# EAGLE board swd_breakout (EAGLE 7.5.0)
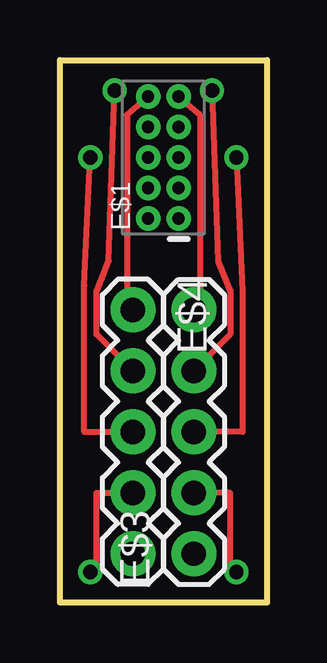
[diagram p0: board, top side]
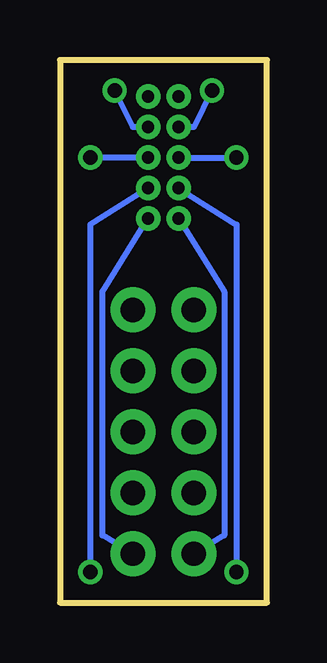
[diagram p1: board, bottom side, seen from below]

Size 8.64 x 22.61 mm. Coordinates in mm from the lower left corner, seen from the top.
Outline: 0,22.61 8.64,22.61 8.64,0 0,0 0,22.61
Copper layers (1*16): Top 0.035mm / dielectric 1.5mm / Bottom 0.035mm
Design rules "default": minimum track width 10mil, minimum drill 24mil, track to track 8mil, track to pad 8mil, pad to pad 8mil, via to via 8mil, smd to smd 8mil, copper to edge 40mil, drill to drill 8mil, minimum pad ring 10mil, minimum via ring 8mil, stop-mask expansion 4mil, vias tented up to drill 0mil, thermal gap 10mil

## Footprints (pad centres in the part's own frame; a part is rotated, then mirrored left to right if it is on the bottom)
2X5-PTH-1.27MM = drill 0.508 pad 1: 1 -2.54,-0.635; 2 -2.54,0.635; 3 -1.27,-0.635; 4 -1.27,0.635; 5 0,-0.635; 6 0,0.635; 7 1.27,-0.635; 8 1.27,0.635; 9 2.54,-0.635; 10 2.54,0.635
1X05 = drill 1.016 pad 1.88: 1 0,0; 2 2.54,0; 3 5.08,0; 4 7.62,0; 5 10.16,0

## Placement (x,y rotation side)
E$1  [2X5-PTH-1.27MM]  4.32,18.54 90 top
E$3  [1X05]  5.59,2.03 90 top
E$4  [1X05]  3.05,12.19 270 top

## Library data of the parts
E$1 E$3 E$4 = SparkFun-Connectors

## Nets
S$1: E$1.4 E$4.4
S$2: E$1.6 E$4.3
S$3: E$1.8 E$4.2
S$4: E$1.9 E$3.5
S$5: E$1.7 E$3.4
S$6: E$1.2 E$4.5
S$8: E$1.5 E$3.3
S$9: E$1.3 E$3.2
S$10: E$1.10 E$4.1
S$11: E$1.1 E$3.1

## Tracks (layer width: path | path; a pad name or v marks a point on that pad's centre or on a via)
S$1  (via drill 0.6 pad 0.25)
  Top 0.254: E$4.4 1.52,4.57 1.52,1.52 v1.27,1.27
  Bottom 0.254: E$1.4 1.27,15.75 v1.27,1.27
S$2  (via drill 0.6 pad 0.25)
  Top 0.254: E$4.3 1.02,7.11 1.02,13.21 v1.27,18.54
  Bottom 0.254: E$1.6 v1.27,18.54
S$3  (via drill 0.6 pad 0.25)
  Top 0.254: E$4.2 1.52,11.18 1.52,12.95 2.03,14.22 v2.29,21.34
  Bottom 0.254: v2.29,21.34 3.05,19.81 E$1.8
S$4
  Top 0.254: E$1.9 5.84,20.32 5.84,12.95 E$3.5
S$5  (via drill 0.6 pad 0.25)
  Top 0.254: v6.35,21.34 6.6,14.22 7.11,12.95 7.11,11.18 E$3.4
  Bottom 0.254: E$1.7 5.59,19.81 v6.35,21.34
S$6
  Bottom 0.254: E$1.2 1.78,12.95 1.78,2.79 E$4.5
S$8  (via drill 0.6 pad 0.25)
  Top 0.254: v7.37,18.54 7.62,12.95 7.62,7.11 E$3.3
  Bottom 0.254: E$1.5 v7.37,18.54
S$9  (via drill 0.6 pad 0.25)
  Top 0.254: E$3.2 7.11,4.57 7.11,1.52 v7.37,1.27
  Bottom 0.254: E$1.3 7.37,15.75 v7.37,1.27
S$10
  Top 0.254: E$1.10 2.79,20.32 2.79,12.95 E$4.1
S$11
  Bottom 0.254: E$3.1 6.86,2.79 6.86,12.95 E$1.1